# Altium PCB HA_SWDIMPCB01.PcbDoc
Units mil, origin at the board's own origin, x right, y up, seen from the top; angles counter-clockwise.
Board outline 1968.5 x 3700.79 mil, 2 copper layers (Top Layer, Bottom Layer), stack 61.756 mil thick; 13 components, 4 nets, 170 pads, 76 vias.
Unrouted connection lines stored in the file: 6.
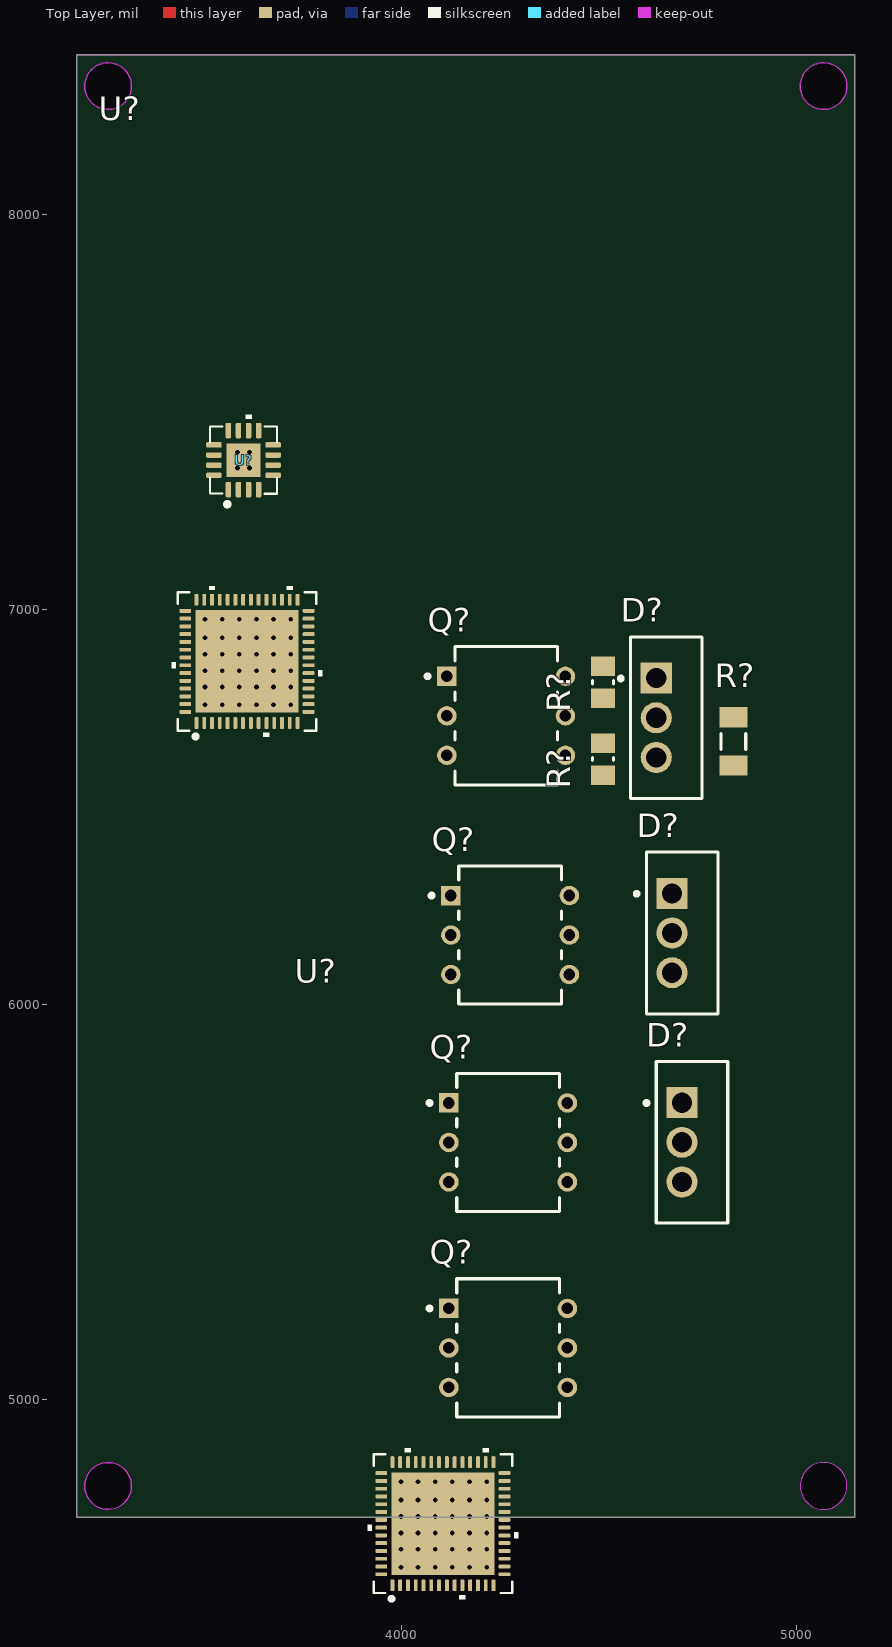
[diagram p0: Top Layer view]
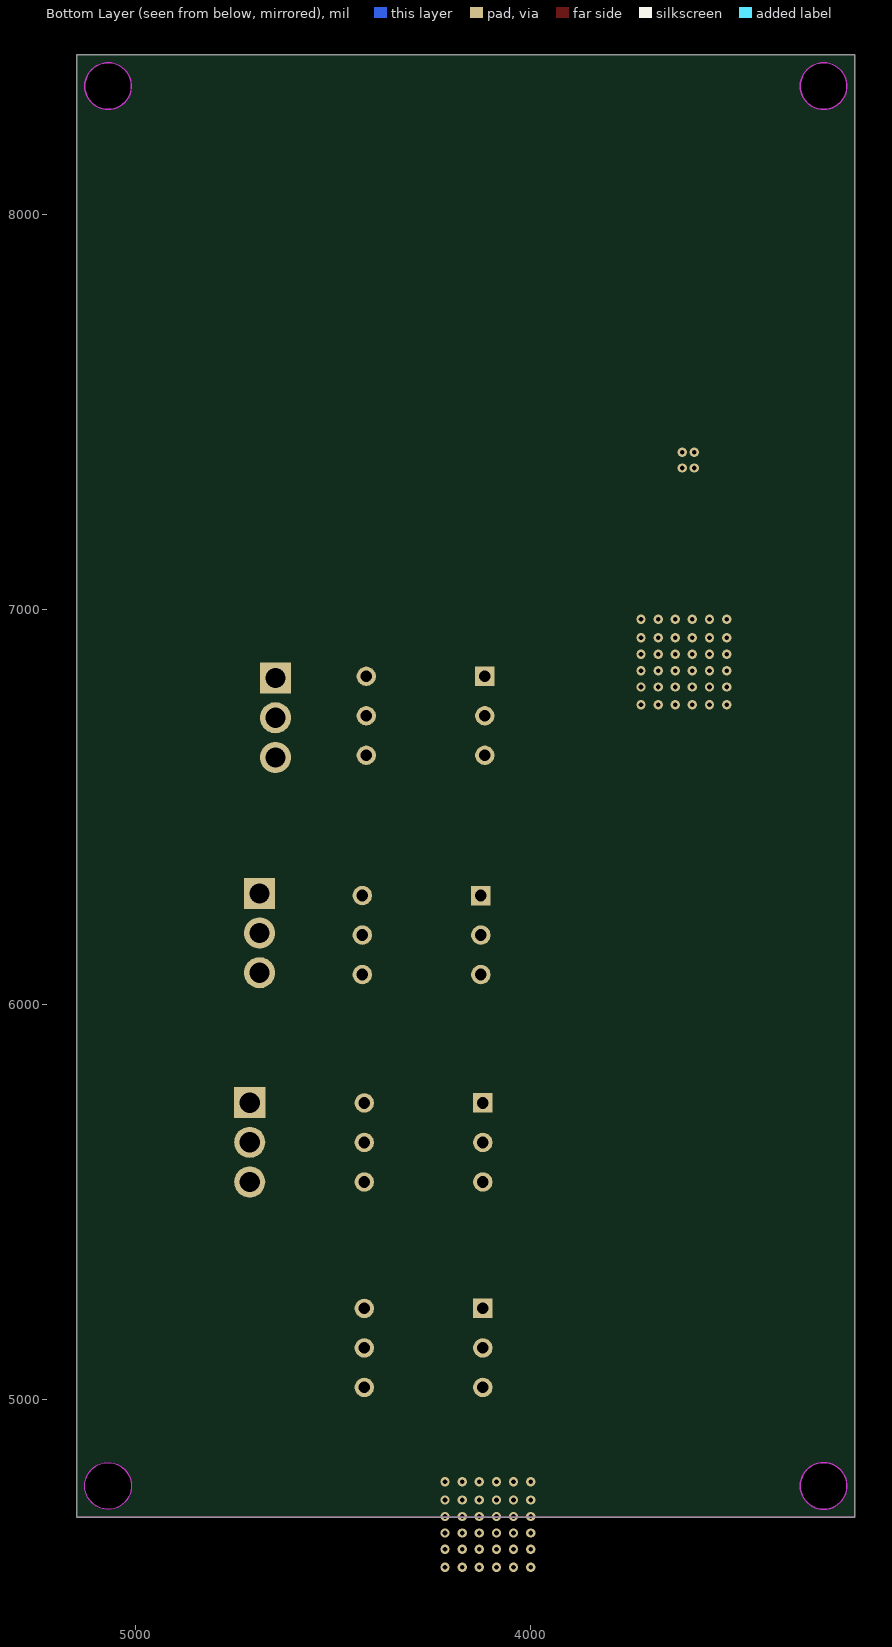
[diagram p1: Bottom Layer view, seen from below]

## Layer stack, top to bottom
Top Solder: solder mask 1, SM-001, Dk 4
Top Layer: signal copper 1.378
Dielectric 1: core 59, Core-043, Dk 4.3
Bottom Layer: signal copper 1.378
Bottom Solder: solder mask 1, SM-001, Dk 4

## Board outline
3178.7,4701.81 3178.7,8402.6 5147.2,8402.6 5147.2,4701.81
cut-out: 5009.41,4780.55 ccw(c5068.46,4780.55) 5068.46,4721.5 ccw(c5068.46,4780.55) 5127.52,4780.55 ccw(c5068.46,4780.55) 5068.46,4839.61 ccw(c5068.46,4780.55)
cut-out: 3257.44,4721.5 cw(c3257.44,4780.55) 3198.39,4780.55 cw(c3257.44,4780.55) 3257.44,4839.61 cw(c3257.44,4780.55) 3316.5,4780.55 cw(c3257.44,4780.55)
cut-out: 5068.46,8264.8 cw(c5068.46,8323.86) 5009.41,8323.86 cw(c5068.46,8323.86) 5068.46,8382.91 cw(c5068.46,8323.86) 5127.52,8323.86 cw(c5068.46,8323.86)
cut-out: 3257.44,8264.8 cw(c3257.44,8323.86) 3198.39,8323.86 cw(c3257.44,8323.86) 3257.44,8382.91 cw(c3257.44,8323.86) 3316.5,8323.86 cw(c3257.44,8323.86)

## Design rules (kind name [scope] priority, off if disabled: settings)
Clearance [All] p1: gap=10 ignorepadtopadclearanceinfootprint=FALSE except(0: Arc-Hole Track-Hole SMDPad-Hole THPad-Hole Via-Hole Fill-Hole Poly-Hole Region-Hole Text-Hole)
PolygonConnect [All] p1: connectstyle=Relief reliefconductorwidth=10 reliefentries=4 polygonreliefangle="90 Angle" airgapwidth=10
RoomDefinition "02. POWER SUPPLY" [InComponentClass('02. POWER SUPPLY')] p1: confinementstyle=ConfineIn formatcopy=TRUE lockcomponents=FALSE outline 0,0 2000,0 2000,1000 0,1000
RoomDefinition "03. EXCUTE BLOCK" [InComponentClass('03. EXCUTE BLOCK')] p2: confinementstyle=ConfineIn formatcopy=TRUE lockcomponents=FALSE outline 5190,4760 8355,4760 8355,5300 5190,5300
RoutingVias [All] p1: holewidth=28 width=50 viastyle="Through Hole" minholewidth=28 minwidth=50 maxholewidth=28 maxwidth=50
SolderMaskExpansion [All] p1: expansion=4 istentingtop=FALSE
Width [All] p1: maxlimit=10 minlimit=10 preferedwidth=10
30 further rules are at their usual default settings.

## Classes and differential pairs
component class "02. POWER SUPPLY": U?
component class "03. EXCUTE BLOCK": D? Q? R?

## Components (designator, comment, footprint, x,y, rotation, side; value= is the part's Value field where it differs from the comment)
D? "BTA24-600BWRG" FP-TO-220AB-MFG 4710.49,6180 r0 top
D? "BTA24-600BWRG" FP-TO-220AB-MFG 4670.49,6725 r0 top
D? "BTA24-600BWRG" FP-TO-220AB-MFG 4735.49,5650.39 r0 top
Q? "MOC3041M" FP-646BX-MFG 4275,6175 r0 top
Q? "MOC3041M" FP-646BX-MFG 4270,5650 r0 top
Q? "MOC3041M" FP-646BX-MFG 4270,5130 r0 top
Q? "MOC3041M" FP-646BX-MFG 4265,6730 r0 top
R? "39R 1206" RESC3216X60X45ML10T20 4840,6665 r90 top
R? "360R 0805" RESC2013X50X30ML20T20 4510,6620.35 r90 top
R? "360R 0805" RESC2013X50X30ML20T20 4510,6815 r90 top
U? "Part Number: CC2538SF53RTQR" QFN56_6P7X6P7 3609.01,6867.67 r90 top value=Value
U? "Part Number: CC2538SF53RTQR" QFN56_6P7X6P7 4105,4685 r90 top value=Value
U? "Part Number: CC2592RGVT" QFN16_2P16X2P16 3600.2,7377.21 r90 top value=Value

## Footprints (in the part's own frame and the unit in brackets; to place one, negate y for a bottom-side part, rotate by r counter-clockwise, add the part's x,y. Pads: shape width x height; smd on the part's side, far side on the other; paste and mask are expansions set on the pad)
FP-646BX-MFG [mm]
  rect 1.25x1.25 hole 0.75 paste-1000 mask+0: 1(-3.81,2.54)
  round 1.25 hole 0.75 paste-1000 mask+0: 2(-3.81,0) 3(-3.81,-2.54) 4(3.81,-2.54) 5(3.81,0) 6(3.81,2.54)
  silkscreen extent -5.17,-4.44 3.3,4.44, body extent -4.53,-4.54 4.53,4.54, height 0.25
FP-TO-220AB-MFG [mm]
  rect 2x2 hole 1.3 paste-1000 mask+0: 1(-0.647,2.55)
  round 2 hole 1.3 paste-1000 mask+0: 2(-0.647,0) 3(-0.647,-2.55)
  silkscreen extent -3.05,-5.2 2.3,5.2, body extent -2.4,-5.3 2.4,5.3, height 0.25
QFN16_2P16X2P16 [mm]
  rrect50% 1x0.35 smd paste-0.175: 1(-1.9,0.975) 2(-1.9,0.325) 3(-1.9,-0.325) 4(-1.9,-0.975) 9(1.9,-0.975) 10(1.9,-0.325) 11(1.9,0.325) 12(1.9,0.975)
  rrect50% 0.35x1 smd paste-0.175: 5(-0.975,-1.905) 6(-0.325,-1.9) 7(0.325,-1.9) 8(0.975,-1.905) 13(0.975,1.9) 14(0.325,1.9) 15(-0.325,1.9) 16(-0.975,1.9)
  rect 2.16x2.16 smd paste-1.067 mask-1.067: 17(0,0)
  silkscreen extent -2.97,-2.15 2.91,2.15, body extent -2.15,-2.1 2.1,2.15, height 1
QFN56_6P7X6P7 [mm]
  rrect50% 0.754x0.25 smd paste-0.15: 1(-3.961,3.25) 2(-3.961,2.75) 3(-3.961,2.25) 4(-3.961,1.75) 5(-3.961,1.25) 6(-3.961,0.75) 7(-3.961,0.25) 8(-3.961,-0.25) 9(-3.961,-0.75) 10(-3.961,-1.25) 11(-3.961,-1.75) 12(-3.961,-2.25) 13(-3.961,-2.75) 14(-3.961,-3.25) 29(3.961,-3.25) 30(3.961,-2.75) 31(3.961,-2.25) 32(3.961,-1.75) 33(3.961,-1.25) 34(3.961,-0.75) 35(3.961,-0.25) 36(3.961,0.25) 37(3.961,0.75) 38(3.961,1.25) 39(3.961,1.75) 40(3.961,2.25) 41(3.961,2.75) 42(3.961,3.25)
  rrect50% 0.25x0.754 smd paste-0.15: 15(-3.251,-3.961) 16(-2.751,-3.961) 17(-2.251,-3.961) 18(-1.75,-3.961) 19(-1.25,-3.961) 20(-0.75,-3.961) 21(-0.25,-3.961) 22(0.25,-3.961) 23(0.75,-3.961) 24(1.25,-3.961) 25(1.75,-3.961) 26(2.251,-3.961) 27(2.751,-3.961) 28(3.251,-3.961) 43(3.251,3.961) 44(2.751,3.961) 45(2.251,3.961) 46(1.75,3.961) 47(1.25,3.961) 48(0.75,3.961) 49(0.25,3.961) 50(-0.25,3.961) 51(-0.75,3.961) 52(-1.25,3.961) 53(-1.75,3.961) 54(-2.251,3.961) 55(-2.751,3.961) 56(-3.251,3.961)
  rect 6.6x6.6 smd paste-3.287 mask-3.289: 57(0,0)
  silkscreen extent -4.95,-4.85 4.85,4.85, body extent -4.13,-4.13 4.13,4.13, height 0.74
RESC2013X50X30ML20T20 [mm] "Chip Resistor, 2-Leads, Body 2.00x1.25mm, IPC Low Density"
  rect 1.25x1.55 smd: 1(-1.025,0) 2(1.025,0)
  silkscreen extent -0.1,-0.67 0.1,0.67, body extent -1.1,-0.72 1.1,0.72, height 0.5
RESC3216X60X45ML10T20 [mm] "Chip Resistor, 2-Leads, Body 3.20x1.60mm, IPC Low Density"
  rect 1.3x1.8 smd: 1(-1.55,0) 2(1.55,0)
  silkscreen extent -0.5,-0.8 0.5,0.8, body extent -1.65,-0.85 1.65,0.85, height 0.6

## Part data
D? D? D?: library part CMP-12193-000008-1, "TRIAC ALTERNISTOR 600V TO220AB", Forward Voltage=1.55V, Gate Trigger Current=50mA, Gate Trigger Voltage=1.3V, Hold Current=75mA, Manufacturer=STMicroelectronics, Max Junction Temp=+125°C, Off State Voltage=600V, On State Current Rms=25A, Package=TO-220AB, Temperature="-40°C to +125°C", Temperature Range Low=-40°C, Automotive=No, Category=Diode, ComponentLink2Description=Datasheet, ComponentLink2URL=https://www.st.com/resource/en/datasheet/bta24.pdf, Device Class L1="Discrete Semiconductors", Device Class L2=Thyristors, Device Class L3=TRIACs, Digikey Description="TRIAC ALTERNISTOR 600V TO220AB", Height=19.65mm, Lead Free=Yes, Manufacturer Part Number=BTA24-600BWRG, Mouser Description="Triacs 25 Amp 600 Volt", Octopart=https://octopart.com/bta24-600bwrg-stmicroelectronics-360258, RoHS=TRUE, Standoff Height=3.75mm, Temperature Range High=+125°C
Q? Q? Q? Q?: library part CMP-07144-000005-1, "OPTOISOLATOR 4.17KV TRIAC 6DIP", Forward Current=30mA, Forward Voltage=1.25V, Isolation Voltage=4170Vrms, Manufacturer="ON Semiconductor", Max Junction Temp=+100°C, Package=646BX, Power Dissipation=250mW, Reverse Voltage=6V, Temperature="-40°C to +85°C", Temperature Range High=+85°C, Temperature Range Low=-40°C, Automotive=No, Category=Trans, ComponentLink2Description=Datasheet, ComponentLink2URL=https://www.onsemi.com/pub/Collateral/MOC3043M-D.pdf, Device Class L1=Optoelectronics, Device Class L2=Optocouplers, Device Class L3=unset, Digikey Description="OPTOISOLATOR 4.17KV TRIAC 6DIP", Footprint Url=https://www.onsemi.com/pub/Collateral/646BX.PDF, Height=5.08mm, Lead Free=Yes, Manufacturer Part Number=MOC3041M, Mouser Description="Optocoupler Triac AC Output 1 Channel 400VDRM 6-Pin Plastic Dip White Bulk", Octopart=https://octopart.com/moc3041m-on+semiconductor-84330395, RoHS=TRUE, Standoff Height=0.38mm
R?: library part CMP-2003-02141-1, Manufacturer="Vishay Dale", Part Number=CRCW120639R0FKEA
R? R?: library part CMP-2001-03844-1, Manufacturer="Vishay Dale", Part Number=CRCW0805360RJNEA
U? U?: library part CC2538SF53RTQR, "IC RF TxRx + MCU 802.15.4 6LoWPAN, Zigbee® 2.4GHz 56-VFQFN Exposed Pad", Built_By=EMA_UL_Team, Copyright="Copyright (C) 2018 Accelerated Designs. All rights reserved", Manufacturer_Part_Number=CC2538SF53RTQR, RefDes=RefDes, Type=DEV, Vendor="Texas Instruments"
U?: library part CC2592RGVT, "No Description Available", Built_By=EMA_UL_Team, Copyright="Copyright (C) 2018 Accelerated Designs. All rights reserved", Manufacturer_Part_Number=CC2592RGVT, RefDes=RefDes, Type=DEV, Vendor="Texas Instruments"

## Via types
v1: diameter 23.62, hole 11.81, Top Layer to Bottom Layer, 76 vias

## Nets (pads, with @x,y where several pads share a name; then routed paths per layer and width w, separated by ;. In a path a pad name is that pad's centre, name@x,y a point inside that pad or via, vN(x,y) a via of type N, cw(c..) or ccw(c..) an arc to the next point about the centre after c; other vN are vias at no path point)
NetD?_1: D?.1@4645,6825.39 R?.1@4510,6580
NetD?_2: D?.2@4645,6725 R?.2@4510,6855.35 R?.2@4840,6726.02
NetD?_3: D?.3@4645,6624.61 Q?.4@4415,6630 R?.2@4510,6660.71
NetQ?_6: Q?.6@4415,6830 R?.1@4510,6774.65
pads on no net: D?.1@4685,6280.39 D?.1@4710,5750.79 D?.2@4685,6180 D?.2@4710,5650.39 D?.3@4685,6079.61 D?.3@4710,5550 Q?.1 Q?.2 Q?.3 Q?.4@4420,5030 Q?.4@4420,5550 Q?.4@4425,6075 Q?.5 Q?.6@4420,5230 Q?.6@4420,5750 Q?.6@4425,6275 R?.1@4840,6603.98 U?.1 U?.2 U?.3 U?.4 U?.5 U?.6 U?.7 U?.8 U?.9 U?.10 U?.11 U?.12 U?.13 U?.14 U?.15 U?.16 U?.17 U?.18 U?.19 U?.20 U?.21 U?.22 U?.23 U?.24 U?.25 U?.26 U?.27 U?.28 U?.29 U?.30 U?.31 U?.32 U?.33 U?.34 U?.35 U?.36 U?.37 U?.38 U?.39 U?.40 U?.41 U?.42 U?.43 U?.44 U?.45 U?.46 U?.47 U?.48 U?.49 U?.50 U?.51 U?.52 U?.53 U?.54 U?.55 U?.56 U?.57
copper on no net:
  other v1: 3998.69,4575 4042.09,4575 4085.49,4575 4128.89,4575 4172.29,4575 4215.69,4575 3998.69,4620 4042.09,4620 4085.49,4620 4128.89,4620 4172.29,4620 4215.69,4620 3998.69,4661.67 4042.09,4661.67 4085.49,4661.67 4128.89,4661.67 4172.29,4661.67 4215.69,4661.67 3998.69,4703.33 4042.09,4703.33 4085.49,4703.33 4128.89,4703.33 4172.29,4703.33 4215.69,4703.33 3998.69,4745 4042.09,4745 4085.49,4745 4128.89,4745 4172.29,4745 4215.69,4745 3998.69,4791.31 4042.09,4791.31 4085.49,4791.31 4128.89,4791.31 4172.29,4791.31 4215.69,4791.31 3502.7,6757.67 3546.1,6757.67 3589.5,6757.67 3632.9,6757.67 3676.3,6757.67 3719.7,6757.67 3502.7,6802.67 3546.1,6802.67 3589.5,6802.67 3632.9,6802.67 3676.3,6802.67 3719.7,6802.67 3502.7,6844.34 3546.1,6844.34 3589.5,6844.34 3632.9,6844.34 3676.3,6844.34 3719.7,6844.34 3502.7,6886.01 3546.1,6886.01 3589.5,6886.01 3632.9,6886.01 3676.3,6886.01 3719.7,6886.01 3502.7,6927.67 3546.1,6927.67 3589.5,6927.67 3632.9,6927.67 3676.3,6927.67 3719.7,6927.67 3502.7,6973.98 3546.1,6973.98 3589.5,6973.98 3632.9,6973.98 3676.3,6973.98 3719.7,6973.98 3585.2,7357.21 3615.2,7357.21 3585.2,7397.21 3615.2,7397.21

## Keep-outs
Keep-Out Layer:
  circle w0.5: c5068.46,8323.86 r59.06
  circle w0.5: c5068.46,4780.55 r59.06
  circle w0.5: c3257.44,4780.55 r59.06
  circle w0.5: c3257.44,8323.86 r59.06
  lines w0.5: 3178.7,4701.81 5147.2,4701.81 5147.2,8402.6 3178.7,8402.6 3178.7,4701.81

## Text inside footprints (layer, text, board x,y; h text height)
U?: Mechanical 7 "Default Padstyle: RX11p81Y29p69D0T" at 4023.89,6442.67 h50 r90; Mechanical 7 "Heat Tab Padstyle: RX259p84Y259p84D0T" at 4083.89,6405.17 h50 r90; Mechanical 7 "Via Padstyle: EX20Y20D10P" at 4143.89,6555.17 h50 r90; Mechanical 7 "Alt 1 Padstyle: OX60Y90D30P" at 4203.89,6530.17 h50 r90; Mechanical 7 "Alt 2 Padstyle: OX90Y60D30P" at 4263.89,6530.17 h50 r90; Mechanical 7 "0.02in/0.5mm" at 3503.4,7152.54 h25 r90; Mechanical 7 "0.312in/7.921mm" at 3249.14,6773.92 h25 r90; Mechanical 7 "0.312in/7.921mm" at 3621.51,7227.54 h25 r90; Mechanical 7 "0.321in/8.15mm" at 3621.51,6382.8 h25 r90; Mechanical 7 "0.321in/8.15mm" at 3943.89,6780.17 h25 r90; Top 3D Body "*" at 3496.22,6724.08 h50 r90
U?: Mechanical 7 "Default Padstyle: RX11p81Y29p69D0T" at 4519.87,4260 h50 r90; Mechanical 7 "Heat Tab Padstyle: RX259p84Y259p84D0T" at 4579.87,4222.5 h50 r90; Mechanical 7 "Via Padstyle: EX20Y20D10P" at 4639.87,4372.5 h50 r90; Mechanical 7 "Alt 1 Padstyle: OX60Y90D30P" at 4699.87,4347.5 h50 r90; Mechanical 7 "Alt 2 Padstyle: OX90Y60D30P" at 4759.87,4347.5 h50 r90; Mechanical 7 "0.02in/0.5mm" at 3999.39,4969.87 h25 r90; Mechanical 7 "0.312in/7.921mm" at 3745.13,4591.25 h25 r90; Mechanical 7 "0.312in/7.921mm" at 4117.5,5044.87 h25 r90; Mechanical 7 "0.321in/8.15mm" at 4117.5,4200.13 h25 r90; Mechanical 7 "0.321in/8.15mm" at 4439.87,4597.5 h25 r90; Top 3D Body "*" at 3992.2,4541.41 h50 r90
U?: Mechanical 7 "0.163in/4.15mm" at 3858.78,7289.71 h25 r90; Mechanical 7 "0.163in/4.15mm" at 3612.7,6968.63 h25 r90; Mechanical 7 "0.15in/3.8mm" at 3612.7,7660.79 h25 r90; Mechanical 7 "0.15in/3.8mm" at 3316.61,7302.21 h25 r90; Mechanical 7 "0.026in/0.65mm" at 3587.11,7585.79 h25 r90; Mechanical 7 "Alt 2 Padstyle: OX90Y60D30P" at 4178.78,7039.71 h50 r90; Mechanical 7 "Alt 1 Padstyle: OX60Y90D30P" at 4118.78,7039.71 h50 r90; Mechanical 7 "Via Padstyle: EX20Y20D10P" at 4058.78,7064.71 h50 r90; Mechanical 7 "Heat Tab Padstyle: RX85p04Y85p04D0T" at 3998.78,6939.71 h50 r90; Mechanical 7 "Default Padstyle: RX13p78Y39p37D0T" at 3938.78,6952.21 h50 r90; Top 3D Body "*" at 3574.02,7319.59 h50 r90